# Altium PCB IR1.PcbDoc
Units mm, origin at the board's own origin, x right, y up, seen from the top; angles counter-clockwise.
Board outline 25.2 x 20 mm, 2 copper layers (Top Layer, Bottom Layer); 16 components, 0 nets, 44 pads, 110 vias.
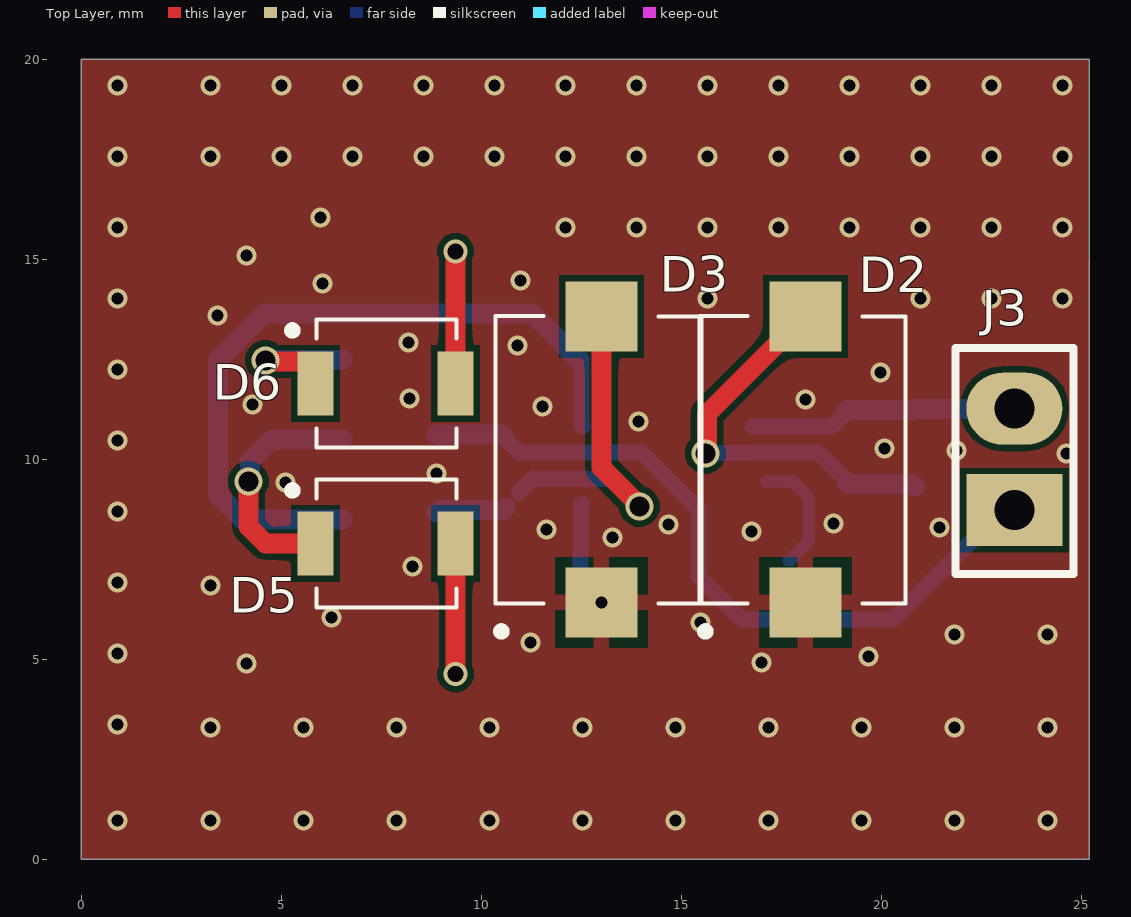
[diagram p0: Top Layer view]
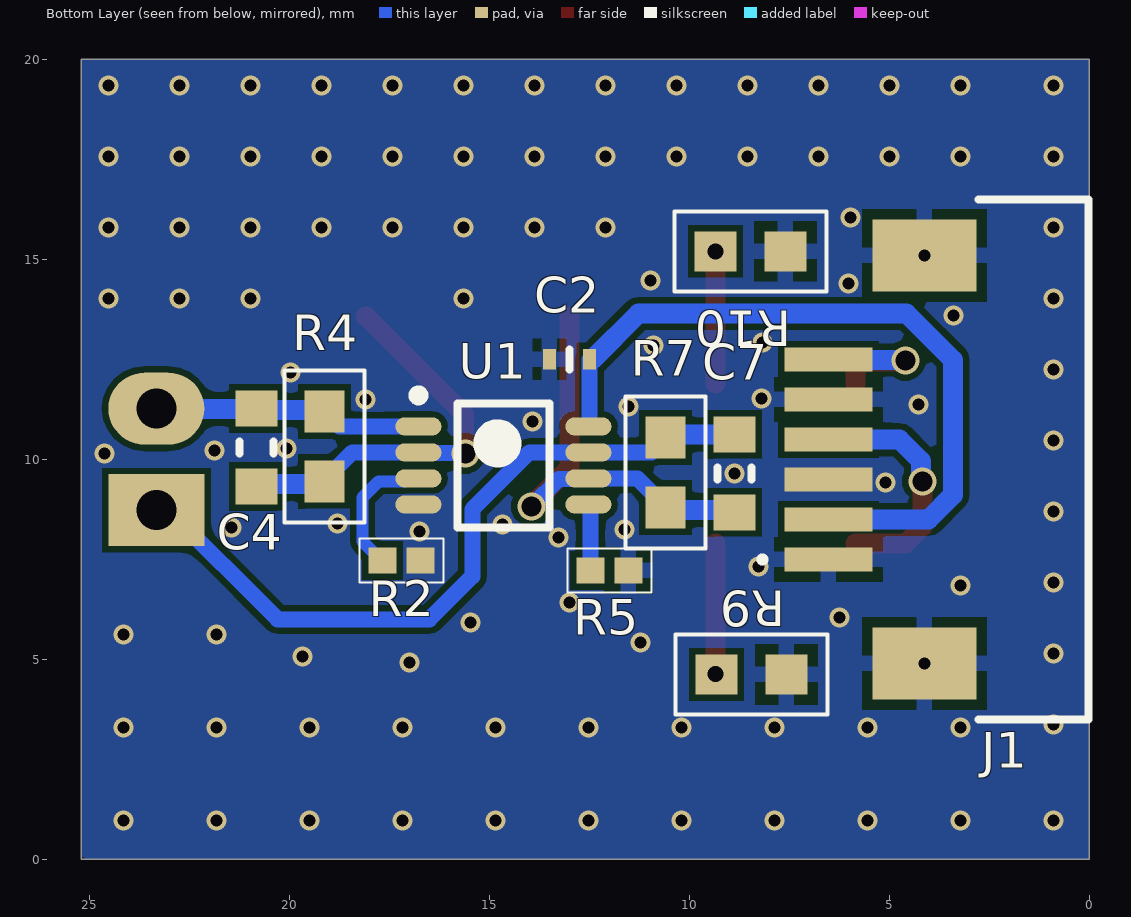
[diagram p1: Bottom Layer view, seen from below]

## Layer stack, top to bottom
Top Solder: solder mask 0.0102, Solder Resist, Dk 3.5
Top Layer: signal copper 0.0356
Dielectric 1: dielectric 0.32, FR-4, Dk 4.8
Bottom Layer: signal copper 0.0356
Bottom Solder: solder mask 0.0102, Solder Resist, Dk 3.5

## Board outline
0,0 25.2,0 25.2,20 0,20

## Design rules (kind name [scope] priority, off if disabled: settings)
Clearance [All] p1: gap=0.254 ignorepadtopadclearanceinfootprint=FALSE
PolygonConnect [All] p1: connectstyle=Relief reliefconductorwidth=0.254 reliefentries=4 polygonreliefangle="90 Angle" airgapwidth=0.254
RoutingVias [All] p1: holewidth=0.711 width=1.27 viastyle="Through Hole" minholewidth=0.711 minwidth=1.27 maxholewidth=0.711 maxwidth=1.27
SolderMaskExpansion [All] p1: expansion=0.102 istentingtop=FALSE
Width [All] p1: maxlimit=0.254 minlimit=0.254 preferedwidth=0.254
30 further rules are at their usual default settings.

## Components (designator, comment, footprint, x,y, rotation, side; value= is the part's Value field where it differs from the comment)
C2 "MLCC" CAPC1005X06L 13,12.504 r0 bottom value=100nF
C4 "MLCC" CAPC1608X09M 20.825,10.3 r90 bottom value=20pF
C7 "MLCC" CAPC1608X09M 8.875,9.65 r90 bottom value=20pF
D2 "VBPW34S" VBPW34S 18.1,10 r90 top
D3 "VBPW34S" VBPW34S 13,10 r90 top
D5 "MTSM0074-843-IR" MTSM0074-843-IR 7.6,7.9 r0 top
D6 "15412085A3060" 15412085A3060 7.6,11.9 r0 top
J1 "68610614422" 68610614422 5.325,10 r90 bottom
J3 "2.54mm jumper" FP_Jumper_2x2_54mm 23.325,10 r270 top
R2 "Chip_Res" RESC1005X04M 17.2,7.475 r0 bottom value=3.3kR
R4 "Chip_Res" RESC1608X06M 19.125,10.325 r270 bottom value=887R
R5 "Chip_Res" RESC1005X04M 12,7.225 r0 bottom value=3.3kR
R7 "Chip_Res" RESC1608X06M 10.6,9.675 r270 bottom value=887R
R9 "Chip_Res" RESC1608X06M 8.45,4.625 r180 bottom value=33kR
R10 "Chip_Res" RESC1608X06M 8.475,15.204 r180 bottom value=33kR
U1 "2Channel OPAMP Comp" TSOP65P490X110-8L 14.65,9.85 r180 bottom

## Footprints (in the part's own frame and the unit in brackets; to place one, negate y for a bottom-side part, rotate by r counter-clockwise, add the part's x,y. Pads: shape width x height; smd on the part's side, far side on the other; paste and mask are expansions set on the pad)
15412085A3060 [mm]
  rect 0.9x1.6 smd: 1(-1.75,0) 2(1.75,0)
  silkscreen extent -2.4,-1.6 1.77,1.6, body extent -1.6,-0.8 1.6,0.8, height 1.85
68610614422 [mm]
  rect 0.6x2.2 smd: 1(-2.5,1.2) 2(-1.5,1.2) 3(-0.5,1.2) 4(0.5,1.2) 5(1.5,1.2) 6(2.5,1.2)
  rect 1.8x2.6 smd: MP1(-5.1,-1.2) MP2(5.1,-1.2)
  silkscreen extent -6.5,-5.3 6.5,2.9, body extent -6.5,-5.1 6.5,2, height 3.01
CAPC1005X06L [mm] "Chip Capacitor, 2-Leads, Body 1.00x0.50mm, IPC High Density"
  rect 0.32x0.52 smd: 1(-0.5,0) 2(0.5,0)
  silkscreen extent 0,-0.25 0,0.25, body extent -0.53,-0.28 0.53,0.28, height 0.55
CAPC1608X09M [mm] "Chip Capacitor, 2-Leads, Body 1.60x0.80mm, IPC Low Density"
  rect 0.9x1.05 smd: 1(-0.975,0) 2(0.975,0)
  silkscreen extent -0.15,-0.43 0.15,0.43, body extent -0.85,-0.45 0.85,0.45, height 0.9
FP_Jumper_2x2_54mm [mm]
  oval 1.8x2.4 hole 1: 1(-1.27,0)
  rect 1.8x2.4 hole 1: 2(1.27,0)
  silkscreen extent -2.78,-1.48 2.87,1.48, body extent -2.52,-1.26 2.56,1.28, height 8.45
MTSM0074-843-IR [mm]
  rect 0.9x1.6 smd: 1(-1.75,0) 2(1.75,0)
  silkscreen extent -2.4,-1.6 1.77,1.6
RESC1005X04M [mm] "Chip Resistor, 2-Leads, Body 1.00x0.50mm, IPC Low Density"
  rect 0.7x0.65 smd: 1(-0.475,0) 2(0.475,0)
  silkscreen extent -1.05,-0.55 1.05,0.55, body extent -0.53,-0.28 0.53,0.28, height 0.4
RESC1608X06M [mm] "Chip Resistor, 2-Leads, Body 1.60x0.80mm, IPC Low Density"
  rect 1.05x1 smd: 1(-0.875,0) 2(0.875,0)
  silkscreen extent -1.9,-1 1.9,1, body extent -0.85,-0.45 0.85,0.45, height 0.55
TSOP65P490X110-8L [mm] "TSOP, 8-Leads, Body 3.00x3.00mm, Pitch 0.65mm, IPC High Density"
  oval 1.15x0.45 smd: 1(-2.125,0.975) 2(-2.125,0.325) 3(-2.125,-0.325) 4(-2.125,-0.975) 5(2.125,-0.975) 6(2.125,-0.325) 7(2.125,0.325) 8(2.125,0.975)
  silkscreen extent -2.25,-1.55 1.15,1.87, body extent -2.52,-1.55 2.52,1.55, height 1.16
VBPW34S [mm]
  rect 1.75x1.8 smd: 1(-3.575,0) 2(3.575,0)
  silkscreen extent -4.38,-2.5 3.58,2.65, body extent -3.35,-2.2 3.35,2.2, height 1.3

## Part data
C2: library part CC0402KRX7R8BB104, "Multilayer Ceramic Capacitor, 0.1 uF, 25 V, ± 10%, X7R, 0402 [1005 Metric]", Case Code (Imperial)=0402, Case Code (Metric)=1005, Dielectric=X7R, Manufacturer=Yageo, Supplier Part Number=311-2077-6-ND, Tolerance=10%, Voltage Rating=25V, Case/Package=0402, Category="Ceramic Capacitors", ID=1, Manufacturer Part Number=CC0402KRX7R8BB104, Part Number=CC0402KRX7R8BB104, Series=CC, Supplier=Digikey, Table="MLCC 0402"
C4 C7: library part CC0603JRNPO9BN200, "Multilayer Ceramic Capacitor, 20 pF, 50 V, ± 5%, C0G (NP0), 0603 [1608 Metric]", Case Code (Imperial)=0603, Case Code (Metric)=1608, Dielectric="C0G, NP0", Manufacturer=Yageo, Supplier Part Number=311-1424-6-ND, Tolerance=5%, Voltage Rating=50V, Case/Package=0603, Category="Ceramic Capacitors", ID=17, Manufacturer Part Number=CC0603JRNPO9BN200, Part Number=CC0603JRNPO9BN200, Series=CC, Supplier=Digikey, Table="MLCC 0603"
D2 D3: "Photodiode 940nm 100ns 130° 2-SMD, Gull Wing", Manufacturer=Vishay, Supplier Part Number=751-1500-2-ND, Category=Photodiodes, ID=1, Manufacturer Part Number=VBPW34S, Part Number=VBPW34S, RoHS=Yes, Supplier=Digikey, Table="Light Pipe"
D5: "Infrared (IR) Emitter 740nm 1.7V 30mA 3.2mW/sr @ 30mA 1206 (3216 Metric)", Manufacturer="Marktech Optoelectronics", Supplier Part Number=1125-MTSM0074-843-IRTR-ND, Category="LED Emitters - Infrared, UV, Visible", ID=0, Manufacturer Part Number=MTSM0074-843-IR, Part Number=MTSM0074-843-IR, RoHS=Yes, Supplier=Digikey, Table="LED Inferared"
D6: "Infrared (IR) Emitter 850nm 1.4V 15mW/sr @ 20mA 30° 1206 (3216 Metric)", Manufacturer="Wurth Elektronik", Supplier Part Number=732-12009-2-ND, Category="LED Emitters - Infrared, UV, Visible", ID=1, Manufacturer Part Number=15412085A3060, Part Number=15412085A3060, RoHS=Yes, Supplier=Digikey, Table="LED Inferared"
J1: "6 Position FPC Connector Contacts, Bottom 0.039\" (1.00mm) Surface Mount, Right Angle", Manufacturer="Würth Elektronik", Supplier Part Number=732-1994-2-ND, Category="FFC, FPC (Flat Flexible) Connector Assemblies", Contact Material="Phosphor Bronze", Contact Plating=Tin, ID=1, Manufacturer Part Number=68610614422, Orientation="Right Angle", Part Number=68610614422, Pins=6, Pitch=1mm, RoHS=Yes, Supplier=Digikey, Table=FCC/FPC
J3: library part Header2x1, "2x2.54mm conventional header as jumper", Category=Connectors, Connector Type=Header, Header Orientation=Straight, ID=19, Number of Levels=1, Number of Positions=2, Number of Rows=2, Part Number=Header2x1, Pitch="0.100\" (2.54mm)", Positions Per Level=2, Table="Header Connector"
R2 R5: library part RC0402JR-073K3L, "SMD Chip Resistor, 3.3 kOhm, ± 5%, 63 mW, 0402 [1005 Metric], Thick Film, General Purpose", Case Code (Imperial)=0402, Case Code (Metric)=1005, Manufacturer=Yageo, Max Operating Temperature=155°C, Min Operating Temperature=-55°C, Power Rating=62.5mW, Resistor Type="Thick Film", Supplier Part Number=311-3.3KJRDKR-ND, Temperature Coefficient=100ppm/°C, Tolerance=5%, Case/Package=0402, Category="Chip SMD Resistors", Features="Moisture Resistant", ID=20, Manufacturer Part Number=RC0402JR-073K3L, Part Number=RC0402JR-073K3L, RoHS=Yes, Series=RC, Supplier=Digikey, Table="Resistor 0402", Termination=SMD/SMT
R4 R7: library part RC0603FR-07887RL, "Res Thick Film 0603 887 Ohm 1% 1/10W ±100ppm/°C Molded SMD SMD Paper T/R", Case Code (Imperial)=0603, Case Code (Metric)=1608, Manufacturer=Yageo, Power Rating=100mW, Resistor Type="Thick Film", Supplier Part Number=311-887HRDKR-ND, Temperature Coefficient=100ppm/°C, Tolerance=1%, Case/Package=0603, Category="Chip SMD Resistors", Features="Moisture Resistant", ID=3, Manufacturer Part Number=RC0603FR-07887RL, Part Number=RC0603FR-07887RL, RoHS=Yes, Series=RC_L, Supplier=Digikey, Table="Resistor 0603"
R9 R10: library part AC0603FR-1333KL, "SMD Chip Resistor, 33 kOhm, ± 1%, 100 mW, 0603 [1608 Metric], Thick Film, General Purpose", Case Code (Imperial)=0603, Case Code (Metric)=1608, Manufacturer=Yageo, Power Rating=100mW, Resistor Type="Thick Film", Supplier Part Number=603-AC0603FR-1333KL, Temperature Coefficient=100ppm/°C, Tolerance=1%, Case/Package=0603, Category="Chip SMD Resistors", ID=9, Manufacturer Part Number=AC0603FR-1333KL, Part Number=AC0603FR-1333KL, RoHS=Yes, Series=AC, Supplier=Mouser, Table="Resistor 0603"
U1: library part OPA2380AIDGKR, Case/Package=VSSOP, Manufacturer="Texas Instruments", Max Operating Temperature=125°C, Min Operating Temperature="- 40 C", Supplier Part Number=296-48627-2-ND, Category="Instrumentation, Op Amps, Buffer Amps", Gain Bandwidth Product=90MHz, ID=0, Manufacturer Part Number=OPA2380AIDGKR, Mounting Technology=SMD/SMT, Part Number=OPA2380AIDGKR, RoHS=Yes, Series=-, Slew Rate="80 V/us", Supplier=Digikey, Table="IC OP-AMP"

## Via types
v1: diameter 0.505, hole 0.305, Top Layer to Bottom Layer, tented both sides, 104 vias
v2: diameter 0.7, hole 0.5, Top Layer to Bottom Layer, tented both sides, 4 vias
v3: diameter 0.6, hole 0.4, Top Layer to Bottom Layer, 2 vias

## Nets (pads, with @x,y where several pads share a name; then routed paths per layer and width w, separated by ;. In a path a pad name is that pad's centre, name@x,y a point inside that pad or via, vN(x,y) a via of type N, cw(c..) or ccw(c..) an arc to the next point about the centre after c; other vN are vias at no path point)
pads on no net: C2.1 C2.2 C4.1 C4.2 C7.1 C7.2 D2.1 D2.2 D3.1 D3.2 D5.1 D5.2 D6.1 D6.2 J1.1 J1.2 J1.3 J1.4 J1.5 J1.6 J1.MP1 J1.MP2 J3.1 J3.2 R2.1 R2.2 R4.1 R4.2 R5.1 R5.2 R7.1 R7.2 R9.1 R9.2 R10.1 R10.2 U1.1 U1.2 U1.3 U1.4 U1.5 U1.6 U1.7 U1.8
copper on no net: | length 84.9
  Top Layer w0.5: v2(4.175,9.45) 4.175,8.325 4.6,7.9 5.85,7.9 ; v2(4.6,12.475) 4.625,12.45 5.65,12.45 5.85,12.25 5.85,11.9 ; v3(9.35,4.637) 9.35,7.9 ; 9.35,11.9 v3@9.35,15.177 ; 13,13.575 13,9.8 13.95,8.85 v2(13.95,8.825) ; v2(15.6,10.15) 15.638,10.188 15.638,11.138 18.075,13.575 18.1,13.575
  Bottom Layer w0.3: 17.125,9.45 17.775,9.45 18.175,9.05 18.175,7.95 17.7,7.475 17.675,7.475 ; 19.125,9.45 19.125,9.475
  Bottom Layer w0.4: 10.6,10.55 10.6,10.525 10.95,10.175 12.525,10.175 14,10.175 15.425,8.75 15.425,7.075 16.5,6 20.295,6 23.025,8.73 23.325,8.73 ; 10.95,9.175 11.3,9.525 12.525,9.525 12.535,9.515 13.26,9.515 v2(13.95,8.825) ; 12.475,7.225 12.475,8.852 12.498,8.875 12.525,8.875 ; 12.5,12.504 12.5,10.848 12.523,10.825 12.525,10.825 ; v2(15.6,10.15) 15.615,10.165 16.765,10.165 16.775,10.175 18.425,10.175 19.125,9.475 ; 16.775,10.825 18.75,10.825 18.8,10.875 18.825,10.875 19.125,11.175 19.125,11.2
  Bottom Layer w0.5: v2(4.175,9.45) 4.213,9.488 4.213,9.963 4.75,10.5 6.525,10.5 ; v2(4.6,12.475) 4.613,12.488 6.512,12.488 6.525,12.5 ; 6.525,8.5 4.025,8.5 3.411,9.114 3.411,12.486 4.575,13.65 11.274,13.65 12.42,12.504 ; 8.875,8.675 8.938,8.737 10.537,8.737 10.6,8.8 ; 8.875,10.625 10.525,10.625 ; 19.125,9.45 19.188,9.387 20.762,9.387 20.825,9.325 ; 19.125,11.2 19.163,11.238 20.788,11.238 20.825,11.275 20.84,11.26 23.325,11.26
  other v1: 0.9,0.975 3.225,0.975 5.55,0.975 7.875,0.975 10.2,0.975 12.525,0.975 14.85,0.975 17.175,0.975 19.5,0.975 21.825,0.975 24.15,0.975 3.225,3.3 5.55,3.3 7.875,3.3 10.2,3.3 12.525,3.3 14.85,3.3 17.175,3.3 19.5,3.3 21.825,3.3 24.15,3.3 0.9,3.375 4.125,4.9 17,4.925 19.675,5.075 0.9,5.15 11.225,5.425 21.825,5.625 24.15,5.625 15.475,5.925 6.25,6.05 13,6.425 3.225,6.85 0.9,6.925 8.275,7.325 13.275,8.05 16.75,8.2 11.625,8.25 21.45,8.3 14.675,8.375 18.8,8.4 0.9,8.7 5.1,9.425 8.875,9.65 24.625,10.15 21.875,10.225 20.075,10.275 0.9,10.475 13.925,10.95 11.525,11.325 4.275,11.375 8.2,11.525 18.1,11.5 19.975,12.175 0.9,12.25 10.9,12.85 8.175,12.925 3.4,13.6 0.9,14.025 15.65,14.025 20.975,14.025 22.75,14.025 24.525,14.025 6.025,14.4 10.975,14.475 4.125,15.1 0.9,15.8 12.1,15.8 13.875,15.8 15.65,15.8 17.425,15.8 19.2,15.8 20.975,15.8 22.75,15.8 24.525,15.8 5.975,16.05 0.9,17.575 3.225,17.575 5,17.575 6.775,17.575 8.55,17.575 10.325,17.575 12.1,17.575 13.875,17.575 15.65,17.575 17.425,17.575 19.2,17.575 20.975,17.575 22.75,17.575 24.525,17.575 0.9,19.35 3.225,19.35 5,19.35 6.775,19.35 8.55,19.35 10.325,19.35 12.1,19.35 13.875,19.35 15.65,19.35 17.425,19.35 19.2,19.35 20.975,19.35 22.75,19.35 24.525,19.35
  other v3: 9.35,15.204

## Polygon pours and split planes (outlines as drawn)
no net on Top Layer "NONET_L01_P004" (solid, remove dead copper, pour order 4): 25.175,20 0,20 0,0 25.2,0
no net on Bottom Layer "NONET_L02_P005" (solid, remove dead copper, pour order 5): 25.175,20 0,20 0,0 25.2,0

## Silkscreen, mask and mechanical layers (free items; w line width, h text height)
Board:
  the board outline again, w0.2